# EAGLE board fb_up_2-4fach_tastsensor (EAGLE 5.00)
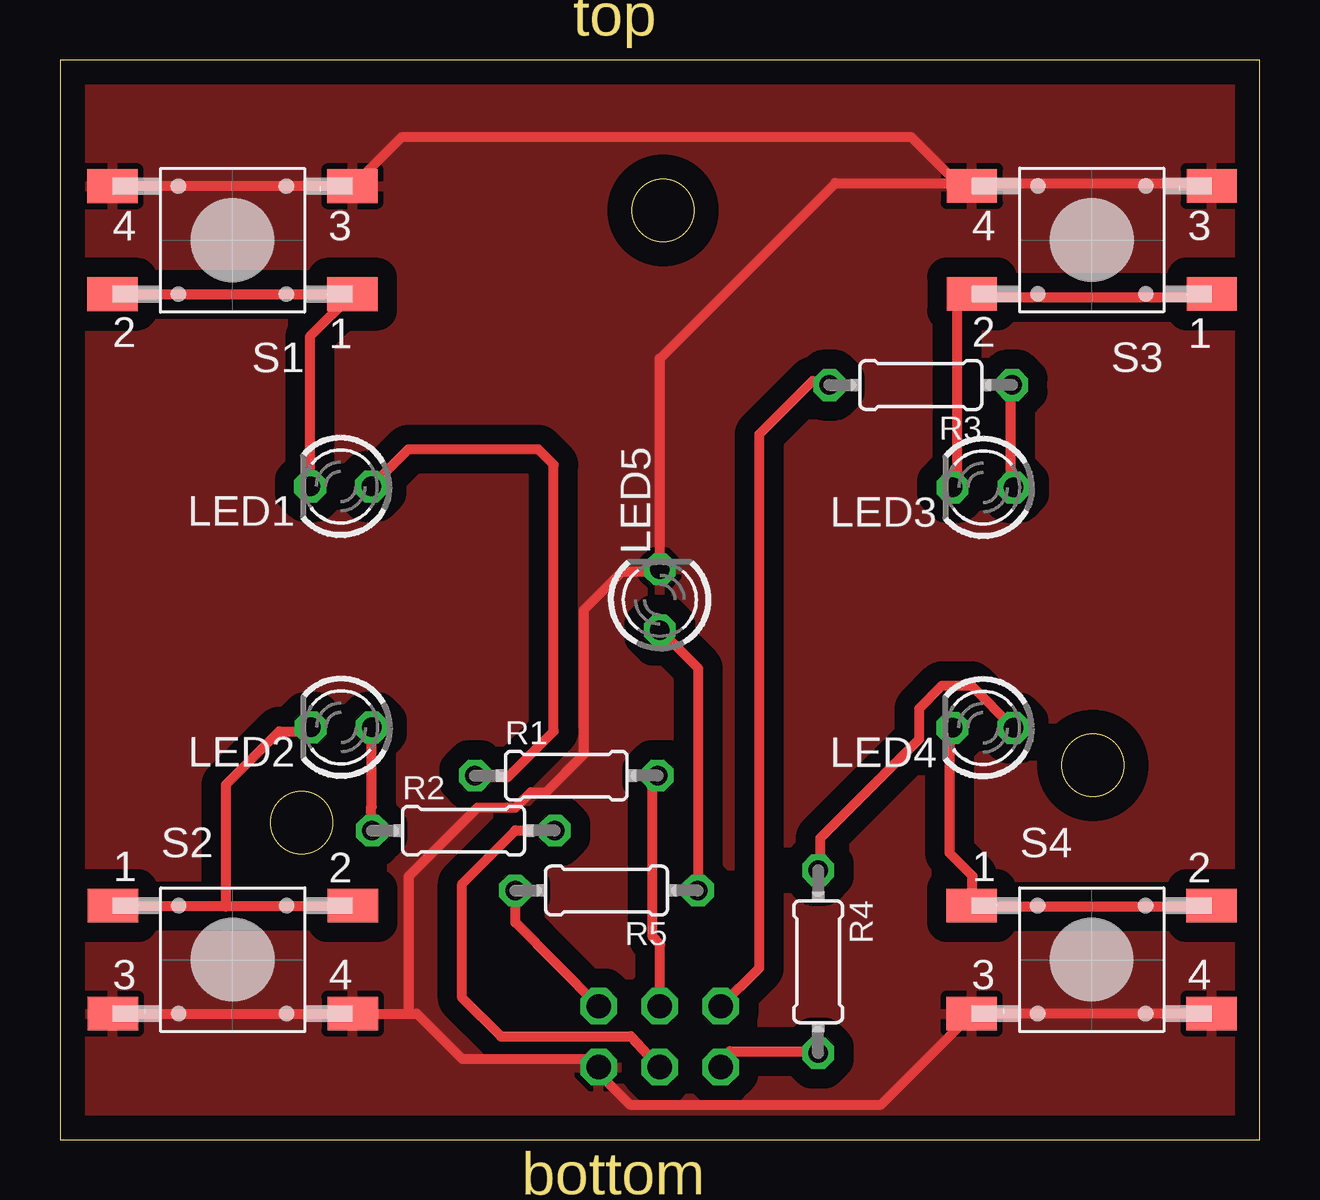
[diagram p0: board, top side]
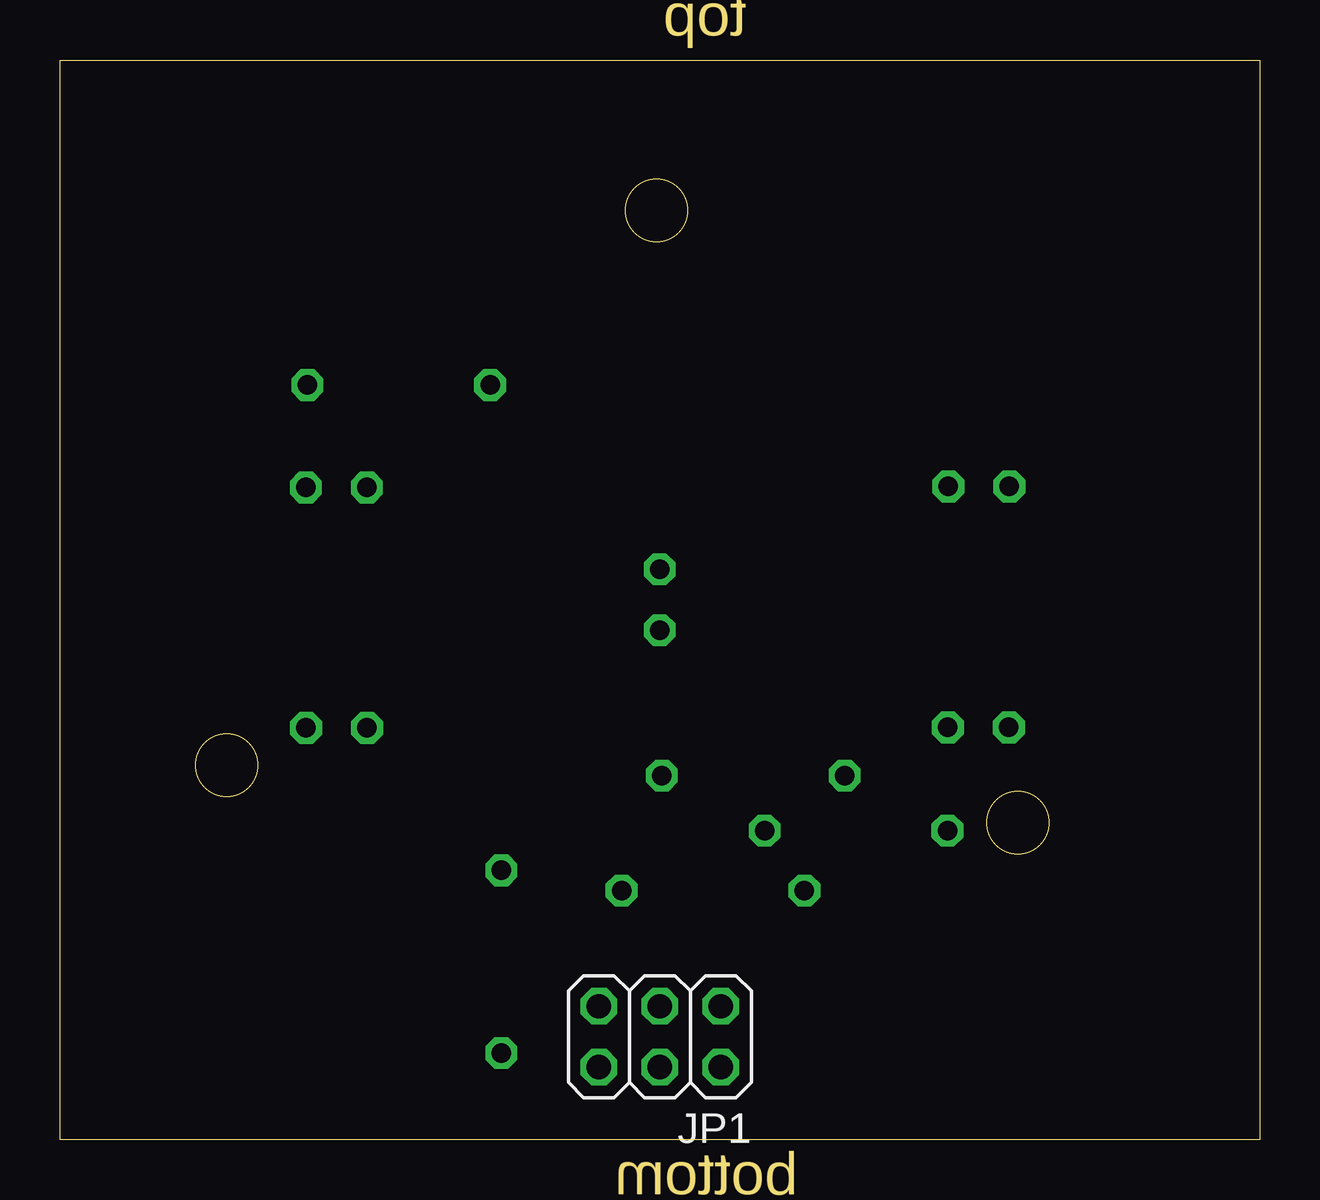
[diagram p1: board, bottom side, seen from below]

Size 50 x 45 mm. Coordinates in mm from the lower left corner, seen from the top.
Outline: 0,0 50,0 50,45 0,45 0,0
Outline: circle at 10.07,13.21 radius 1.3
Outline: circle at 25.13,38.73 radius 1.3
Outline: circle at 43.05,15.6 radius 1.3
Copper layers (1*16): Top 0.035mm / dielectric 1.5mm / Bottom 0.035mm
Design rules "default": minimum track width 10mil, minimum drill 24mil, track to track 8mil, track to pad 8mil, pad to pad 8mil, via to via 8mil, smd to smd 8mil, copper to edge 40mil, drill to drill 8mil, minimum pad ring 10mil, minimum via ring 8mil, stop-mask expansion 4mil, vias tented up to drill 0mil, thermal gap 10mil
tKeepout: area 30.4,17.9 to 31.7,21.2; area 18.2,17.9 to 19.5,27.9; area 0,17.2 to 5,27.2; area 14.5,17.2 to 19.5,27.2; area 30.4,17.2 to 35.4,27.2; area 45,17.2 to 50,27.2; area 0,0 to 50,2.8; area 0,42.2 to 50,45; area 22.6,38.3 to 27.6,39.2; area 9.6,11 to 10.6,15.4; area 42.5,13.4 to 43.5,17.8; area 0,0 to 2.2,45; 1 more areas
bKeepout: area 16.3,44 to 33.8,45; area 46,0.1 to 50,45; area 0,0 to 49.9,1; area 0,0.1 to 4.2,45; area 4.1,38.3 to 10.4,44.9; area 10.4,41.7 to 13.8,45; area 13.9,43.2 to 15.5,45; area 4.2,35 to 7,38.3; area 4.2,33.4 to 5.4,34.9; area 7.1,36.6 to 8.6,38.2; area 10.4,39.9 to 12.1,41.7; area 4.1,0.8 to 9.2,7.7; 25 more areas; 10 lines

## Footprints (pad centres in the part's own frame; a part is rotated, then mirrored left to right if it is on the bottom)
2X03 = drill 1.016 octagon: 1 -2.54,-1.27; 2 -2.54,1.27; 3 0,-1.27; 4 0,1.27; 5 2.54,-1.27; 6 2.54,1.27
LED3MM = drill 0.813 octagon: A -1.27,0; K 1.27,0
0204/7 = drill 0.813 octagon: 1 -3.81,0; 2 3.81,0
TASTER-9314_SMD = smd 2.1 x 1.4: 1 -5,2.25; 2 5,2.25; 3 -5,-2.25; 4 5,-2.25

## Placement (x,y rotation side)
JP1  [2X03]  25,4.28 180 bottom
LED1  [LED3MM]  11.7,27.22 180 top
LED2  [LED3MM]  11.72,17.18 180 top
LED3  [LED3MM]  38.48,27.18 180 top
LED4  [LED3MM]  38.47,17.16 180 top
LED5  [LED3MM]  25,22.5 90 top
R1  [0204/7]  21.1,15.17 0 top
R2  [0204/7]  16.82,12.88 0 top
R3  [0204/7]  35.88,31.45 180 top
R4  [0204/7]  31.6,7.41 270 top
R5  [0204/7]  22.78,10.38 180 top
S1  [TASTER-9314_SMD]  7.19,37.49 180 top
S2  [TASTER-9314_SMD]  7.2,7.5 0 top
S3  [TASTER-9314_SMD]  43.01,37.5 180 top
S4  [TASTER-9314_SMD]  43,7.5 0 top

## Library data of the parts
JP1 = pinhead
LED1-LED5 = led
R1-R5 = rcl
S1-S4 = Ergaenzung

## Nets
GND: JP1.2 LED5.K S1.3 S1.4 S2.3 S2.4 S3.3 S3.4 S4.3 S4.4
N$1: LED1.K S1.1 S1.2
N$2: LED2.K S2.1 S2.2
N$3: LED3.K S3.1 S3.2
N$4: LED4.K S4.1 S4.2
N$5: LED1.A R1.1
N$6: LED2.A R2.1
N$7: LED3.A R3.1
N$8: LED4.A R4.1
N$9: LED5.A R5.1
N$10: JP1.1 R5.2
N$11: JP1.3 R1.2
N$12: JP1.4 R2.2
N$13: JP1.5 R3.2
N$14: JP1.6 R4.2

## Tracks (layer width: path | path; a pad name or v marks a point on that pad's centre or on a via)
GND
  Top 0.406: S2.3 2.16,5.25 | 2.16,5.25 S2.4 14.54,5.25 | 2.16,5.25 2.16,5.27 | S1.4 11.82,39.74 12,39.56 S1.3 14.23,41.78 35.5,41.78 37.4,39.88 38.04,39.88 38.04,39.78 | 38.04,39.78 S3.4 38.01,39.58 | 48.13,39.88 48.2,39.88 | 48.13,39.88 S3.3 | 38.04,39.78 38.13,39.88 48.13,39.88 | 38.01,39.58 38.04,39.56 | 38.01,39.58 37.72,39.88 32.32,39.88 25,32.55 LED5.K 24.91,23.68 23.43,23.68 21.84,22.09 21.84,16.06 20.26,14.47 19.62,14.47 18.99,13.84 17.4,13.84 14.54,10.98 14.54,5.25 | 14.54,5.25 14.88,5.25 16.77,3.36 22.48,3.36 22.52,3.4 JP1.2 22.57,2.64 23.75,1.46 34.23,1.46 38.04,5.27 | S4.4 47.98,5.27 38.04,5.27 | 38.04,5.27 38.02,5.27 S4.3 38.02,5.25 38.04,5.27
  pour Top (isolate 0.813): -0.38,45.59 50.1,45.59 50.42,45.27 50.42,-0.13 50.1,-0.45 -0.38,-0.45
N$1
  Top 0.406: S1.2 11.88,35.24 12,35.11 12.13,35.24 S1.1 10.41,33.47 10.41,27.21 | 10.41,27.21 10.41,26.86 | 10.41,27.21 LED1.K
N$2
  Top 0.406: S2.1 2.16,9.75 | 2.16,9.75 S2.2 12.16,9.71 6.92,9.71 6.92,14.79 9.14,17.02 10.1,17.02 10.41,17.33 10.45,17.3 LED2.K | 2.16,9.75 2.16,9.71
N$3
  Top 0.406: S3.1 47.88,35.12 47.88,35.11 38.15,35.11 S3.2 38.04,35.22 38.04,35.11 37.4,35.11 37.4,27.37 LED3.K
N$4
  Top 0.406: LED4.K 37.09,17.04 37.09,11.93 38.04,10.98 38.04,9.71 | S4.2 47.96,9.71 38.04,9.71 | S4.1 38.04,9.71
N$5
  Top 0.406: LED1.A 14.51,28.76 19.94,28.76 20.57,28.13 20.57,17.02 18.67,15.11 17.35,15.11 R1.1
N$6
  Top 0.406: R2.1 12.96,13.83 12.95,13.84 12.99,13.88 LED2.A
N$7
  Top 0.406: LED3.A 39.62,27.3 39.62,31.39 R3.1
N$8
  Top 0.406: LED4.A 37.98,18.92 36.77,18.92 35.81,17.97 35.81,16.7 31.69,12.57 31.69,11.14 | 31.69,11.14 31.69,10.98 | R4.1 31.69,11.14
N$9
  Top 0.406: 26.61,10.36 26.61,10.35 | R5.1 26.61,10.36 | LED5.A 26.61,19.63 26.61,10.36
N$10
  Top 0.406: R5.2 18.99,10.36 18.99,9.04 JP1.1
N$11
  Top 0.406: R1.2 24.7,14.96 24.7,8.44 25.02,8.12 25.02,5.9 25.06,5.9 JP1.3
N$12
  Top 0.406: JP1.4 23.8,4.3 23.75,4.29 18.38,4.29 16.77,5.9 16.77,10.66 18.99,12.89 R2.2
N$13
  Top 0.406: JP1.5 29.15,7.16 29.15,29.4 31.37,31.62 32.01,31.62 32.01,31.51 R3.2
N$14
  Top 0.406: 31.68,3.68 31.69,3.68 | 31.68,3.68 R4.2 | JP1.6 27.92,3.68 31.68,3.68

## Text on the board
Dimension: top | bottom
tDocu: tiefe hinten 2.84 | tiefe vorne 2.8 | Platine 1.00mm